# Altium PCB arm_board_n.PcbDoc (part 3 of 3)
Units mm, origin at the board's own origin, x right, y up, seen from the top; angles counter-clockwise.
Board outline 101.22 x 59.56 mm, 4 copper layers (Top Layer, Int1 (GND), Int2 (PWR), Bottom Layer), stack 1.565 mm thick; 88 components, 104 nets, 470 pads, 175 vias.
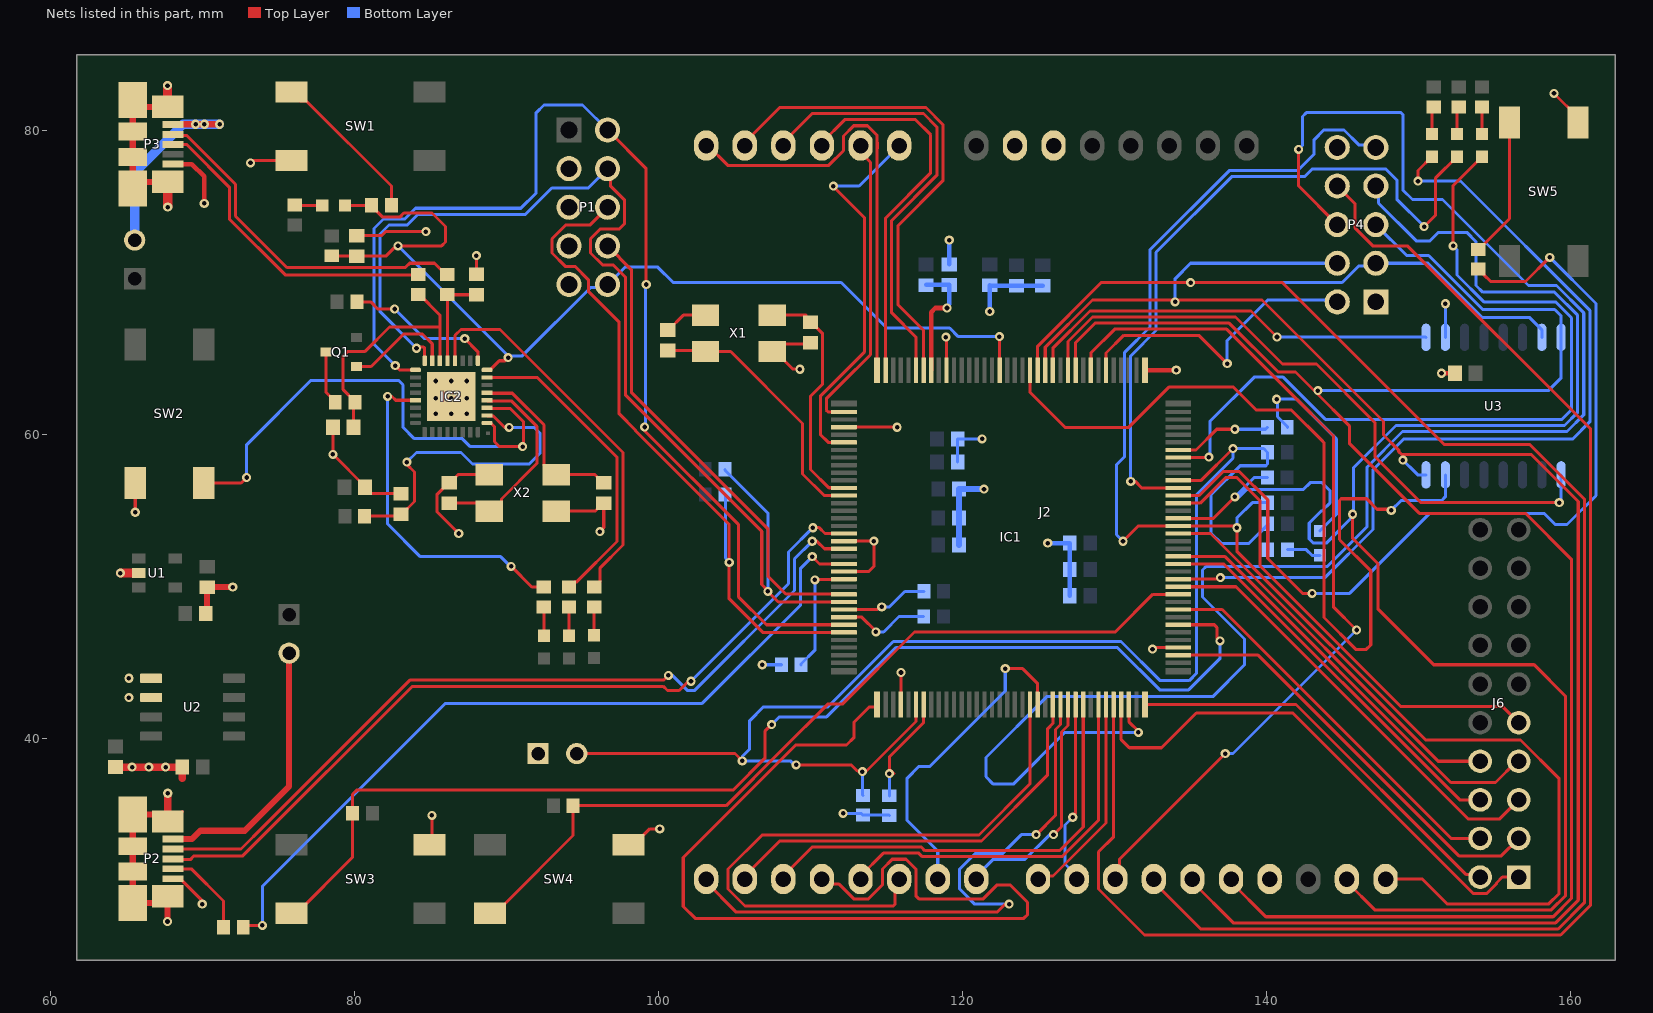
[diagram p4: the nets of this part, all layers, seen from the top]

## Via types
v1: diameter 0.6, hole 0.3, Top Layer to Bottom Layer, 175 vias

## Nets (pads, with @x,y where several pads share a name; then routed paths per layer and width w, separated by ;. In a path a pad name is that pad's centre, name@x,y a point inside that pad or via, vN(x,y) a via of type N, cw(c..) or ccw(c..) an arc to the next point about the centre after c; other vN are vias at no path point) (continued)
BOOT1_1: IC1.P42 IC1.P98 J4.2 R23.1 R24.1 R27.2 R29.2 | length 99.4
  Top Layer w0.2: J4.2@94.615,38.989 105.029,38.989 v1(105.508,38.51) v1@105.508,38.344 ; v1(109.044,38.245) 109.075,38.245 109.093,38.227 112.694,38.227 113.075,37.846 113.682,37.846 116.94,41.104 IC1.P42@116.94,42.213 ; IC1.P98@134.19,56.963 135.703,56.963 v1(137.795,59.055)
  Bottom Layer w0.2: v1(109.044,38.245) 108.936,38.245 108.671,38.51 v1(105.508,38.51) 105.508,38.799 105.996,39.287 105.996,41.155 106.9,42.059 111.147,42.059 115.443,46.355 130.429,46.355 133.004,43.78 134.909,43.78 135.392,44.264 135.392,56.017 137.795,58.42 v1(137.795,59.055) 139.812,59.055 R23.1@140.066,58.801 140.066,58.042 139.949,57.925 138.264,57.925 136.352,56.013 136.352,53.496 137.027,52.821 138.85,52.821 140.081,54.052 R24.1@140.081,54.102 R27.2@140.081,52.4 ; v1(113.411,37.8) 113.411,36.27 R29.2@113.448,36.232
BOOT1_2: IC1.P43 R30.2 | length 7
  Top Layer w0.2: v1@115.48,37.68 115.189,37.972 115.189,38.787 117.44,41.038 IC1.P43@117.44,42.213
  Bottom Layer w0.2: R30.2@115.189,36.21 v1(115.189,37.673)
BOOT2_9: IC1.P102 R28.2 | length 6.5
  Top Layer w0.2: IC1.P102@134.19,58.963 135.355,58.963 136.717,60.325 v1(137.922,60.325)
  Bottom Layer w0.2: v1(137.922,60.325) 139.939,60.325 R28.2@140.066,60.452
GND: C1.1 C2.1 C4.1 C5.1 C6.1 C7.1 C8.1 C9.1 C10.1 C11.2 C12.1 C13.1 C14.1 C15.1 C16.1 C17.1 C18.1 C19.1 C20.1 C21.1 C22.1 C23.1 C24.1 C25.1 C26.1 IC1.P4 IC1.P19 IC1.P23 IC1.P40 IC1.P76 IC1.P109 IC1.P135 IC2.EXP J2.6 J2.7 J2.29 J4.1 LED1.1 P1.3 P1.5 P1.7 P1.9 P2.5 P2.SH1 P2.SH2 P2.SH3 P2.SH4 P2.SH5 P2.SH6 P3.5 P4.1 P4.10 R1.2 R28.1 R29.1 R30.1 SW1.2 SW2.1 SW3.3 SW4.3 SW5.4 U1.2 U2.1 U2.2 U3.10 X1.4 X2.2 X2.4 | length 134
  Top Layer w0.2: v1(65.568,54.865) SW2.1@65.568,56.791 ; U2.2@66.192,42.672 U2.2@66.617,42.672 ; P2.SH2@67.255,29.143 67.691,29.579 P2.SH2@67.705,29.593 ; P2.SH1@67.255,34.968 P2.SH1@67.705,34.518 ; P2.SH1@68.017,34.518 P2.SH1@68.667,35.168 ; P2.5@68.065,30.756 68.53,30.756 69.977,29.309 v1(69.977,29.083) ; C15.1@70.214,48.199 C15.1@70.301,48.286 ; v1(73.152,77.851) 73.315,78.014 SW1.2@75.841,78.014 ; C21.1@78.573,60.452 v1(78.573,58.677) 80.685,56.565 C22.1@80.685,56.515 80.685,56.465 81.063,56.087 C19.1@83.058,56.087 ; C11.2@80.137,73.065 81.776,73.065 82.036,73.325 v1(84.693,73.325) ; SW3.3@84.941,32.984 85.09,33.133 v1(85.09,34.925) ; v1@86.868,53.467 v1(86.851,53.467) 85.433,54.885 85.433,56.059 86.183,56.809 C23.1@86.233,56.809 86.283,56.809 86.808,57.334 X2.2@88.859,57.334 ; C20.1@88.011,70.525 v1(88.011,71.755) ; X2.4@93.259,54.934 95.818,54.934 96.343,55.459 C24.1@96.393,55.459 96.393,53.848 v1(96.139,53.594) ; P1.9@93.946,69.85 P1.9@94.107,69.85 ; SW4.3@98.022,32.984 98.372,32.984 99.424,34.036 v1(100.076,34.036) ; v1(109.293,64.277) 108.842,64.277 107.684,65.435 X1.4@107.484,65.435 107.992,65.943 C7.1@110.278,65.943 ; IC1.P23@112.19,50.963 113.828,50.963 114.161,51.296 114.161,52.955 v1(114.169,52.963) IC1.P19@112.19,52.963 ; IC1.P4@112.19,60.463 115.686,60.463 v1(115.692,60.457) v1@115.697,60.452 ; IC1.P40@115.94,42.213 115.94,44.312 v1(115.951,44.323) ; v1@118.872,66.421 118.94,66.353 IC1.P135@118.94,64.213 ; v1(132.499,45.863) 132.585,45.863 132.685,45.963 IC1.P76@134.19,45.963 ; v1(158.915,82.423) 160.492,80.846 SW5.4@160.492,80.496
  Top Layer w0.3: P3.5@68.065,77.769 69.297,77.769 70.104,76.962 v1(70.104,75.184) ; IC1.P109@132,64.213 v1(134.063,64.213) ; v1(151.511,64.008) C25.1@152.4,64.008
  Top Layer w0.4: P2.SH2@67.255,29.143 P2.SH6@65.405,29.143 P2.SH5@65.405,31.218 P2.SH4@65.405,32.893 P2.SH3@65.405,34.968 P2.SH1@67.255,34.968 ; v1(67.691,27.94) P2.SH2@67.691,29.579 ; C15.1@70.301,48.286 C16.1@70.301,49.937 v1(71.983,49.937)
  Top Layer w0.5: C17.1@64.262,38.1 v1(65.363,38.1) v1(66.465,38.1) v1(67.566,38.1) C18.1@68.667,38.1 68.667,37.367 ; P2.SH1@67.705,34.518 v1(67.705,36.378)
  Top Layer w0.6: v1(64.586,50.866) U1.2@65.799,50.866
  Bottom Layer w0.2: v1(106.822,44.831) R1.2@108.077,44.831 R1.2@108.067,44.841 ; v1(112.141,35.052) 113.357,35.052 113.357,35.024 R29.1@113.448,34.932 ; R29.1@113.462,34.946 115.153,34.946 R30.1@115.189,34.91 ; C1.1@119.674,58.166 C2.1@119.674,59.69 v1(121.285,59.69) ; C14.1@121.793,69.81 C14.1@121.833,69.77 ; v1(140.661,62.302) 140.716,62.247 140.716,61.152 141.366,60.502 R28.1@141.366,60.452 ; v1@140.716,62.357 140.771,62.302 141.983,62.302 144.591,59.694 144.591,54.713 LED1.1@143.51,53.632 ; U3.10@151.765,66.374 v1(151.765,68.58)
  Bottom Layer w0.3: C26.1@119.126,71.171 v1(119.126,72.771) ; v1(121.793,68.072) C14.1@121.793,69.81 ; C14.1@121.833,69.77 C12.1@125.273,69.77 ; v1(125.603,52.832) C8.1@127.047,52.832 C9.1@127.047,51.105 C10.1@127.047,49.378
  Bottom Layer w0.4: C4.1@119.761,52.705 C5.1@119.761,54.483 C6.1@119.761,56.388 v1(121.412,56.388)
  other v1: 65.151,42.672 65.151,43.942 85.344,61.341 86.36,61.341 87.376,61.341 85.344,62.357 86.36,62.357 87.376,62.357 85.344,63.5 86.36,63.5 87.376,63.5 118.906,66.387
NetC3_1: C3.1 X1.2 | length 2.9
  Top Layer w0.2: C3.1@100.6,66.857 100.65,66.857 101.628,67.835 X1.2@103.084,67.835
NetC3_2: C3.2 IC1.P13 X1.3 | length 17.5
  Top Layer w0.2: C3.2@100.6,65.507 103.012,65.507 X1.3@103.084,65.435 104.745,65.435 109.474,60.706 109.474,57.38 110.891,55.963 IC1.P13@112.19,55.963
NetC7_2: C7.2 IC1.P12 X1.1 | length 15.8
  Top Layer w0.2: X1.1@107.484,67.835 109.686,67.835 109.686,67.715 C7.2@109.982,67.419 ; C7.2@109.998,67.365 110.048,67.365 110.798,66.615 110.798,63.3 110.001,62.503 110.001,57.677 111.199,56.478 112.175,56.478 IC1.P12@112.19,56.463
NetC11_1: C11.1 D1.2 IC1.P128 IC2.8 P1.10 R7.2 R8.2 | length 67.3
  Top Layer w0.2: R7.2@78.486,71.74 80.112,71.74 C11.1@80.137,71.715 82.05,71.715 82.567,72.231 82.589,72.231 82.748,72.39 85.725,72.39 85.979,72.644 85.979,73.66 85.09,74.549 83.239,74.549 82.972,74.282 81.848,74.282 81.123,75.007 R8.2@81.123,75.057 D1.2@79.375,75.057 ; IC2.8@88.71,64.234 88.92,64.234 89.52,64.834 89.899,64.834 v1(90.103,65.038) ; v1(122.428,66.421) 122.44,66.409 IC1.P128@122.44,64.213
  Bottom Layer w0.2: v1(82.856,72.39) 90.103,65.143 v1(90.103,65.038) 90.224,65.159 91.038,65.159 95.522,69.642 96.439,69.642 P1.10@96.647,69.85 97.79,70.993 99.949,70.993 100.965,69.977 112.014,69.977 115.004,66.987 119.155,66.987 119.721,66.421 v1(122.428,66.421)
NetC19_2: C19.2 IC2.2 R9.1 | length 21.4
  Top Layer w0.2: R9.1@80.66,54.61 82.931,54.61 C19.2@83.058,54.737 83.108,54.737 83.947,55.576 83.947,57.517 83.439,58.025 v1(83.439,58.166) ; IC2.2@88.71,61.234 88.75,61.194 89.123,61.194 89.865,60.452 v1(90.17,60.452)
  Bottom Layer w0.2: v1(83.439,58.166) 84.074,58.801 86.995,58.801 87.757,58.039 91.495,58.039 92.202,58.746 92.202,60.071 91.821,60.452 v1(90.17,60.452)
NetC20_2: C20.2 IC2.13 R13.2 | length 6.3
  Top Layer w0.2: IC2.13@86.11,64.834 R13.2@86.11,69.196 ; R13.2@86.121,69.215 R13.2@86.106,69.2 R13.2@86.11,69.196 ; C20.2@88.011,69.175 86.131,69.175 R13.2@86.11,69.196
NetC21_2: C21.2 IC2.14 R14.2 R15.2 | length 17.2
  Top Layer w0.2: C21.2@79.923,60.452 79.923,62.001 R15.2@80.025,62.103 80.025,62.153 79.248,62.93 79.248,65.151 79.55,65.453 80.693,65.453 82.296,67.056 85.61,67.056 ; R14.2@84.201,69.2 84.251,69.2 85.61,67.841 85.61,67.056 ; IC2.14@85.61,64.834 85.61,67.056
NetC23_2: C23.2 IC2.4 X2.3 | length 13.8
  Top Layer w0.2: C23.2@86.233,55.459 88.334,55.459 X2.3@88.859,54.934 89.059,54.934 89.659,55.534 89.659,55.734 91.994,58.069 91.994,60.516 90.316,62.194 88.75,62.194 IC2.4@88.71,62.234
NetC24_2: C24.2 IC2.5 X2.1 | length 11.7
  Top Layer w0.2: IC2.5@88.71,62.734 88.75,62.694 90.382,62.694 92.459,60.617 92.459,57.934 93.059,57.334 X2.1@93.259,57.334 95.818,57.334 96.343,56.809 C24.2@96.393,56.809
NetC26_2: C26.2 FB1.2 IC1.P137 | length 8.1
  Top Layer w0.3: IC1.P137@117.94,64.213 117.94,68.029 118.215,68.304 v1(118.977,68.304)
  Bottom Layer w0.2: FB1.2@117.602,69.81 FB1.2@117.613,69.821 ; v1(118.977,68.304) 118.977,68.413 v1@119.126,68.561
  Bottom Layer w0.3: FB1.2@117.613,69.821 C26.2@119.126,69.821 v1@119.126,68.561
NetD1_1: D1.1 R6.1 | length 1.8
  Top Layer w0.2: R6.1@76.073,75.072 76.088,75.057 D1.1@77.875,75.057
NetD2_2: D2.2 R10.2 | length 1.9
  Top Layer w0.2: D2.2@94.107,46.736 R10.2@94.107,48.638
NetD3_2: D3.2 R11.2 | length 1.9
  Top Layer w0.2: D3.2@95.758,46.769 R11.2@95.758,48.641
NetD4_2: D4.2 R12.2 | length 1.9
  Top Layer w0.2: D4.2@92.456,46.739 R12.2@92.456,48.641
NetD5_1: D5.1 R19.2 | length 1.8
  Top Layer w0.2: D5.1@150.876,79.759 150.876,81.407 R19.2@151.003,81.534
NetD5_2: D5.2 IC1.P85 | length 57.8
  Top Layer w0.2: IC1.P85@134.19,50.463 136.76,50.463 136.86,50.563 v1(136.968,50.563) ; v1(149.964,76.656) 149.964,77.347 D5.2@150.876,78.259
  Bottom Layer w0.2: v1(136.968,50.563) 143.831,50.563 147.004,53.736 147.004,57.665 149.029,59.69 160.147,59.69 161.271,60.814 161.271,68.152 152.767,76.656 v1(149.964,76.656)
NetD6_1: D6.1 R20.2 | length 1.8
  Top Layer w0.2: D6.1@152.527,79.759 152.527,81.407 R20.2@152.654,81.534
NetD6_2: D6.2 IC1.P97 | length 46.8
  Top Layer w0.2: v1(131.064,56.896) 131.354,56.896 131.787,56.463 IC1.P97@134.19,56.463 ; v1(150.368,73.66) 151.104,74.396 151.104,76.836 D6.2@152.527,78.259
  Bottom Layer w0.2: v1(131.064,56.896) 131.064,65.151 132.734,66.821 132.734,71.97 137.707,76.943 142.493,76.943 143.002,77.452 147.846,77.452 148.571,76.727 148.571,75.457 v1(150.368,73.66)
NetD7_1: D7.1 R21.2 | length 1.8
  Top Layer w0.2: D7.1@154.178,79.759 R21.2@154.178,81.534
NetD7_2: D7.2 IC1.P101 | length 54.3
  Top Layer w0.2: IC1.P101@134.19,58.463 134.203,58.476 136.19,58.476 v1(136.203,58.488) ; v1(152.273,72.39) 152.273,76.354 D7.2@154.178,78.259
  Bottom Layer w0.2: v1(136.203,58.488) 136.271,58.557 136.271,60.833 139.192,63.754 141.097,63.754 143.872,60.979 159.444,60.979 160.071,61.606 160.071,67.655 159.019,68.707 154.3,68.707 152.527,70.48 152.527,72.136 v1(152.273,72.39)
NetIC1_P2: IC1.P2 J2.10 | length 20.1
  Top Layer w0.2: IC1.P2@112.19,61.463 111.157,61.463 111.04,61.58 111.04,62.336 112.053,63.349 113.938,65.234 113.938,77.888 113.288,78.538 J2.10@113.288,78.994
NetIC1_P6: IC1.P6 J2.9 | length 25.6
  Top Layer w0.2: v1(111.506,76.327) 111.506,76.286 113.538,74.254 113.538,65.399 110.64,62.501 110.64,59.979 111.156,59.463 IC1.P6@112.19,59.463
  Bottom Layer w0.2: v1(111.506,76.327) 113.195,76.327 115.828,78.96 J2.9@115.828,78.994
NetIC1_P18: IC1.P18 P2.3 | length 54.8
  Top Layer w0.2: P2.3@68.065,32.056 68.117,32.004 69.186,32.004 69.44,32.258 72.647,32.258 83.804,43.415 100.3,43.415 100.584,43.131 101.354,43.131 101.972,43.749 v1(102.134,43.749) ; v1(110.149,53.848) 110.568,53.848 110.953,53.463 IC1.P18@112.19,53.463
  Bottom Layer w0.2: v1(102.134,43.749) 108.547,50.162 108.547,52.246 v1(110.149,53.848)
NetIC1_P20: IC1.P20 P2.2 | length 54.8
  Top Layer w0.2: P2.2@68.065,32.706 72.529,32.706 74.091,34.268 83.638,43.815 100.33,43.815 v1(100.647,44.133) ; v1(110.109,52.959) 110.415,52.959 110.911,52.463 IC1.P20@112.19,52.463
  Bottom Layer w0.2: v1(100.647,44.133) 100.901,44.133 101.885,43.149 102.382,43.149 108.947,49.713 108.947,51.797 v1(110.109,52.959)
NetIC1_P22: IC1.P22 R31.2 | length 52.7
  Top Layer w0.2: R31.2@72.674,27.559 72.801,27.686 v1(73.929,27.686) ; v1(110.109,51.943) 110.589,51.463 IC1.P22@112.19,51.463
  Bottom Layer w0.2: v1(73.929,27.686) 73.929,30.241 85.979,42.291 102.87,42.291 109.347,48.768 109.347,51.181 v1(110.109,51.943)
NetIC1_P24: IC1.P24 R1.1 | length 7.9
  Top Layer w0.2: v1(110.282,50.419) 110.304,50.441 112.168,50.441 IC1.P24@112.19,50.463
  Bottom Layer w0.2: R1.1@109.377,44.831 109.377,44.881 110.282,45.786 v1(110.282,50.419)
NetIC1_P26: IC1.P26 P1.8 | length 31.6
  Top Layer w0.2: P1.8@96.647,72.39 98.209,70.828 98.209,62.758 107.188,53.779 107.188,50.673 108.377,49.484 112.169,49.484 IC1.P26@112.19,49.463
NetIC1_P27: IC1.P27 IC2.16 P1.4 R2.1 | length 76.4
  Top Layer w0.2: v1(84.074,65.659) 84.147,65.732 84.54,65.732 84.61,65.662 IC2.16@84.61,64.834 ; P1.4@96.647,77.47 96.823,77.294 96.823,76.345 97.772,75.396 97.772,73.863 97.424,73.515 96.181,73.515 95.522,72.856 95.522,71.924 96.306,71.14 97.008,71.14 97.809,70.339 97.809,62.592 106.788,53.613 106.788,50.106 107.188,49.706 v1(107.188,49.657) 107.882,48.963 IC1.P27@112.19,48.963
  Bottom Layer w0.2: v1(84.074,65.659) 81.68,68.053 81.68,73.171 82.267,73.758 83.468,73.758 84.176,74.466 84.963,74.466 84.987,74.442 91.216,74.442 92.974,76.2 95.377,76.2 P1.4@96.647,77.47 ; R2.1@104.372,57.683 104.372,57.633 107.188,54.817 v1(107.188,49.657)
NetIC1_P28: IC1.P28 R4.1 | length 5.8
  Top Layer w0.2: IC1.P28@112.19,48.463 114.395,48.463 114.573,48.641 v1(114.681,48.641)
  Bottom Layer w0.2: v1(114.681,48.641) 115.189,48.641 116.205,49.657 R4.1@117.46,49.657
NetIC1_P29: IC1.P29 R5.1 | length 6.1
  Top Layer w0.2: IC1.P29@112.19,47.963 113.368,47.963 114.3,47.031 v1(114.3,46.99)
  Bottom Layer w0.2: v1(114.3,46.99) 114.808,46.99 115.824,48.006 R5.1@117.445,48.006
NetIC1_P30: IC1.P30 IC2.17 P1.2 | length 75.6
  Top Layer w0.2: v1(82.677,64.516) 82.959,64.234 IC2.17@84.01,64.234 ; P1.2@96.647,80.01 99.187,77.47 v1(99.187,69.85) ; v1(99.08,60.472) 99.08,60.235 105.248,54.068 105.248,49.311 107.096,47.463 IC1.P30@112.19,47.463
  Bottom Layer w0.2: v1(82.677,64.516) 81.28,65.913 81.28,73.533 81.905,74.158 83.302,74.158 84.01,74.866 90.938,74.866 91.948,75.877 91.948,81.153 92.456,81.661 94.996,81.661 P1.2@96.647,80.01 ; v1(99.08,60.472) 99.134,60.526 99.134,69.797 v1(99.187,69.85)
NetIC1_P31: IC1.P31 P1.6 R3.1 | length 46.5
  Top Layer w0.2: P1.6@96.647,74.93 95.471,73.754 93.88,73.754 92.982,72.856 92.982,71.924 93.859,71.047 94.5,71.047 95.377,70.171 95.377,69.402 96.453,68.326 97.409,67.37 97.409,61.341 98.48,60.27 98.48,60.224 104.648,54.056 v1(104.648,51.562) 104.648,49.169 106.854,46.963 IC1.P31@112.19,46.963
  Bottom Layer w0.2: R3.1@104.372,56.032 104.394,56.01 104.394,51.879 104.648,51.625 v1(104.648,51.562)
NetIC1_P37: IC1.P37 J2.18 | length 63.4
  Top Layer w0.2: J2.18@110.748,30.734 111.064,30.418 111.848,30.418 112.832,29.434 113.809,29.434 114.728,30.353 114.728,31.39 115.372,32.034 116.284,32.034 116.928,31.39 116.928,29.63 117.124,29.434 121.364,29.434 122.283,30.353 123.115,30.353 124.269,29.2 124.269,28.384 124.033,28.148 102.408,28.148 101.624,28.932 101.624,32.155 109.017,39.548 112.365,39.548 112.869,40.052 112.869,41.065 113.841,42.037 114.28,42.037 114.38,42.137 IC1.P37@114.38,42.213
NetIC1_P57: IC1.P57 J2.20 | length 42
  Top Layer w0.2: J2.20@115.828,30.734 115.56,30.466 115.56,29.073 115.443,28.956 105.69,28.956 104.568,30.078 104.568,31.39 106.812,33.634 121.079,33.634 124.44,36.995 IC1.P57@124.44,42.213
NetIC1_P58: IC1.P58 J2.21 | length 21.7
  Top Layer w0.2: v1(122.809,44.577) 123.952,44.577 124.94,43.589 IC1.P58@124.94,42.213
  Bottom Layer w0.2: J2.21@118.368,30.734 118.368,32.577 116.332,34.613 116.332,37.338 117.14,38.146 117.856,38.146 122.809,43.099 v1(122.809,44.577)
NetIC1_P60: IC1.P60 J2.16 | length 27.7
  Top Layer w0.2: J2.16@105.668,30.734 105.668,30.934 107.968,33.234 121.245,33.234 125.603,37.592 125.603,40.628 125.94,40.965 IC1.P60@125.94,42.213
NetIC1_P61: IC1.P61 J2.15 | length 41.3
  Top Layer w0.2: J2.15@103.128,30.734 103.128,30.534 105.106,28.556 122.268,28.556 122.795,29.083 123.06,29.083 v1(123.063,29.086) ; v1(124.841,33.655) 126.111,34.925 126.111,40.571 126.44,40.9 IC1.P61@126.44,42.213
  Bottom Layer w0.2: v1(123.063,29.086) 123.06,29.083 120.803,29.083 119.808,30.078 119.808,31.39 120.822,32.404 122.615,32.404 123.866,33.655 v1(124.841,33.655)
NetIC1_P62: IC1.P62 J2.22 | length 15.4
  Top Layer w0.2: v1(125.984,33.655) 126.511,34.182 126.511,40.405 126.94,40.834 IC1.P62@126.94,42.213
  Bottom Layer w0.2: J2.22@120.908,30.734 120.908,30.934 121.978,32.004 124.079,32.004 125.73,33.655 v1(125.984,33.655)
NetIC1_P63: IC1.P63 J2.24 | length 12.1
  Top Layer w0.2: v1(127.254,34.798) 127.254,34.906 127.44,35.092 IC1.P63@127.44,42.213
  Bottom Layer w0.2: v1(127.254,34.798) 126.746,34.29 126.746,31.728 127.508,30.966 J2.24@127.508,30.734
NetIC1_P64: IC1.P64 J2.17 | length 29.5
  Top Layer w0.2: J2.17@108.208,30.734 108.208,30.934 110.108,32.834 117.29,32.834 117.52,32.603 126.382,32.603 127.94,34.162 IC1.P64@127.94,42.213
NetIC1_P66: IC1.P66 J2.19 | length 25.2
  Top Layer w0.2: J2.19@113.288,30.734 113.288,30.934 114.788,32.434 117.124,32.434 117.355,32.203 126.547,32.203 128.94,34.596 IC1.P66@128.94,42.213
NetIC1_P67: IC1.P67 J2.23 | length 13.8
  Top Layer w0.2: J2.23@124.968,30.734 125.166,30.932 125.951,30.932 127.53,32.512 129.44,34.422 IC1.P67@129.44,42.213
NetIC1_P68: IC1.P68 P4.8 | length 102.5
  Top Layer w0.2: IC1.P68@129.94,42.213 129.94,33.515 128.948,32.523 128.948,30.078 131.975,27.051 159.353,27.051 161.309,29.007 161.309,60.358 149.295,72.372 147.017,72.372 145.829,73.56 145.829,75.151 P4.8@144.653,76.327
NetIC1_P69: IC1.P69 J6.1 | length 35
  Top Layer w0.2: IC1.P69@130.44,42.213 130.44,39.903 130.973,39.37 133.096,39.37 135.382,41.656 141.732,41.656 153.602,29.786 154.496,29.786 155.126,30.416 155.126,30.471 155.516,30.861 J6.1@156.591,30.861
NetIC1_P70: IC1.P70 P4.6 | length 115.5
  Top Layer w0.2: IC1.P70@130.94,42.213 130.94,41.087 131.572,40.455 v1(131.572,40.386) ; v1(142.113,78.74) 142.113,76.327 P4.6@144.653,73.787
  Bottom Layer w0.2: v1(131.572,40.386) 126.746,40.386 123.337,36.977 122.027,36.977 121.539,37.465 121.539,38.735 125.54,42.736 136.462,42.736 138.557,44.831 138.557,46.526 135.792,49.29 135.792,51.062 136.039,51.308 144.01,51.308 146.604,53.902 146.604,57.831 148.952,60.179 159.776,60.179 160.871,61.274 160.871,67.987 159.078,69.78 157.238,69.78 151.58,75.438 149.606,75.438 148.971,76.073 148.971,81.036 148.854,81.153 142.621,81.153 142.367,80.899 142.367,78.994 v1(142.113,78.74)
NetIC1_P72: IC1.P72 J6.2 | length 26.8
  Top Layer w0.2: IC1.P72@132,42.213 141.937,42.213 153.11,31.04 153.872,31.04 J6.2@154.051,30.861
NetIC1_P75: IC1.P75 J6.3 | length 28.3
  Top Layer w0.2: IC1.P75@134.19,45.463 139.449,45.463 152.654,32.258 155.448,32.258 J6.3@156.591,33.401
NetIC1_P79: IC1.P79 R17.1 SW3.2 | length 78.6
  Top Layer w0.2: SW3.2@75.841,28.484 76.191,28.484 79.868,32.161 R17.1@79.868,35.052 79.868,36.307 80.137,36.576 104.897,36.576 106.995,38.674 106.995,40.447 v1(107.442,40.894) ; IC1.P79@134.19,47.463 136.56,47.463 136.733,47.29 136.733,46.603 v1(136.938,46.398)
  Bottom Layer w0.2: v1(107.442,40.894) 107.95,41.402 111.056,41.402 115.609,45.955 130.194,45.955 132.969,43.18 134.874,43.18 136.948,45.254 136.948,46.388 v1(136.938,46.398)
NetIC1_P81: IC1.P81 J6.4 | length 26.1
  Top Layer w0.2: IC1.P81@134.19,48.463 137.084,48.463 152.146,33.401 J6.4@154.051,33.401
NetIC1_P83: IC1.P83 R18.1 SW4.2 | length 55.1
  Top Layer w0.2: SW4.2@88.922,28.484 89.272,28.484 89.872,29.084 89.872,29.088 94.376,33.592 R18.1@94.376,35.56 104.446,35.56 108.077,39.191 111.125,42.238 112.088,42.238 116.841,46.991 130.049,46.991 132.521,49.463 IC1.P83@134.19,49.463
NetIC1_P84: IC1.P84 J6.5 | length 29.3
  Top Layer w0.2: IC1.P84@134.19,49.963 137.997,49.963 153.289,34.671 155.321,34.671 J6.5@156.591,35.941
NetIC1_P87: IC1.P87 J6.6 | length 26.3
  Top Layer w0.2: IC1.P87@134.19,51.463 137.184,51.463 152.706,35.941 J6.6@154.051,35.941
NetIC1_P88: IC1.P88 J6.7 | length 29.1
  Top Layer w0.2: IC1.P88@134.19,51.963 137.25,51.963 152.129,37.084 155.067,37.084 156.464,38.481 J6.7@156.591,38.481
NetIC1_P91: IC1.P91 J6.8 | length 26.1
  Top Layer w0.2: IC1.P91@134.19,53.463 136.316,53.463 151.298,38.481 J6.8@154.051,38.481
NetIC1_P92: IC1.P92 J2.32 P4.9 R26.1 | length 99.3
  Top Layer w0.2: v1(130.556,52.959) 131.56,53.963 137.826,53.963 137.941,53.848 v1(138.049,53.848) 138.049,52.295 150.466,39.878 156.714,39.878 159.258,37.334 159.258,29.785 158.575,29.102 151.879,29.102 150.247,30.734 J2.32@147.828,30.734
  Bottom Layer w0.2: v1(130.556,52.959) 130.129,53.386 130.129,57.993 130.664,58.528 130.664,65.386 132.334,67.056 132.334,72.136 137.541,77.343 142.038,77.343 143.132,78.437 143.132,79.378 143.764,80.01 145.101,80.01 146.068,79.043 147.017,79.043 P4.9@147.193,78.867 ; v1(138.049,53.848) 138.049,54.483 139.065,55.499 R26.1@140.066,55.499
NetIC1_P93: IC1.P93 J2.31 P4.7 R25.1 | length 117.2
  Top Layer w0.2: IC1.P93@134.19,54.463 136.505,54.463 v1(137.922,55.88) ; J2.31@145.288,30.734 145.288,30.534 147.12,28.702 158.741,28.702 159.658,29.619 159.658,42.78 157.607,44.831 151.003,44.831 147.32,48.514 147.32,51.493 145.669,53.144 v1(145.669,54.737)
  Bottom Layer w0.2: R25.1@140.051,57.15 139.192,57.15 v1(137.922,55.88) 138.212,55.88 138.707,56.375 142.429,56.375 142.869,56.815 143.643,56.815 144.191,56.267 144.191,55.493 143.643,54.945 143.599,54.945 142.81,54.156 142.81,53.108 143.086,52.832 143.934,52.832 145.715,54.613 145.715,57.772 148.522,60.579 159.61,60.579 160.471,61.44 160.471,67.821 158.95,69.342 154.231,69.342 153.783,69.79 153.783,72.669 153.174,73.279 151.309,73.279 150.755,72.725 149.846,72.725 147.369,75.202 147.369,76.151 P4.7@147.193,76.327
NetIC1_P95: IC1.P95 J6.9 | length 32.3
  Top Layer w0.2: IC1.P95@134.19,55.463 135.631,55.463 137.318,57.15 138.049,57.15 139.573,55.626 139.573,51.337 148.814,42.096 155.516,42.096 J6.9@156.591,41.021
NetIC1_P96: IC1.P96 R22.1 | length 59.7
  Top Layer w0.2: IC1.P96@134.19,55.963 135.565,55.963 137.152,57.55 138.215,57.55 140.081,55.684 140.081,51.816 142.367,49.53 v1(143.002,49.53) ; R22.1@153.924,70.866 153.974,70.866 154.299,70.541 154.299,70.491 154.744,70.046 157.041,70.046 v1(158.633,71.638)
  Bottom Layer w0.2: v1(143.002,49.53) 145.467,49.53 150.733,54.796 158.258,54.796 158.998,54.056 159.772,54.056 161.671,55.955 161.671,68.601 v1(158.633,71.638)
NetIC1_P114: IC1.P114 P4.2 | length 20.3
  Top Layer w0.2: IC1.P114@129.44,64.213 129.44,65.336 130.611,66.507 135.55,66.507 v1(137.414,64.643)
  Bottom Layer w0.2: v1(137.414,64.643) 137.414,66.167 140.081,68.834 144.526,68.834 P4.2@144.653,68.707
NetIC1_P116: IC1.P116 J2.25 | length 57.3
  Top Layer w0.2: IC1.P116@128.44,64.213 128.44,65.336 130.011,66.907 137.378,66.907 141.596,62.689 144.336,59.95 144.338,59.947 144.397,59.889 144.397,48.643 v1(145.923,47.117) ; J2.25@130.048,30.734 130.316,31.002 130.316,32.018 v1(137.287,38.989)
  Bottom Layer w0.2: v1(137.287,38.989) 137.795,38.989 v1(145.923,47.117)
NetIC1_P118: IC1.P118 J2.28 P4.5 U3.16 | length 123.5
  Top Layer w0.2: IC1.P118@127.44,64.213 127.44,66.03 128.717,67.307 137.544,67.307 140.765,64.086 141.908,64.086 143.256,62.738 145.446,60.548 145.446,59.405 150.055,54.796 157.036,54.796 160.058,51.774 160.058,29.453 158.856,28.251 139.951,28.251 137.668,30.534 J2.28@137.668,30.734
  Bottom Layer w0.2: v1(143.383,62.865) 158.541,62.865 159.385,63.709 U3.16@159.385,66.374 159.385,67.776 158.962,68.199 154.221,68.199 150.665,71.755 149.225,71.755 P4.5@147.193,73.787
NetIC1_P119: IC1.P119 U3.1 | length 43.1
  Top Layer w0.2: IC1.P119@126.94,64.213 126.94,66.095 128.552,67.707 137.957,67.707 141.049,64.615 143.284,64.615 147.126,60.773 147.126,58.538 150.165,55.499 v1(159.258,55.499)
  Bottom Layer w0.2: v1(159.258,55.499) 159.258,55.607 159.385,55.734 U3.1@159.385,57.324
NetIC1_P121: IC1.P121 U3.9 | length 27.7
  Top Layer w0.2: IC1.P121@125.94,64.213 125.94,65.661 128.386,68.107 138.978,68.107 v1(140.69,66.395)
  Bottom Layer w0.2: v1(140.69,66.395) 150.474,66.395 U3.9@150.495,66.374
NetIC1_P122: IC1.P122 J2.27 P4.4 U3.8 | length 112.7
  Top Layer w0.2: IC1.P122@125.44,64.213 125.44,65.727 128.547,68.834 133.523,68.834 ; v1(133.985,68.707) 133.858,68.834 133.523,68.834 ; J2.27@135.128,30.734 135.128,30.534 137.811,27.851 159.021,27.851 160.509,29.339 160.509,55.57 157.405,58.674 148.88,58.674 148.7,58.853 148.7,58.945 147.701,59.944 147.701,60.833 139.7,68.834 133.523,68.834
  Bottom Layer w0.2: v1(133.985,68.707) 133.985,70.231 135.001,71.247 P4.4@144.653,71.247 ; v1@148.844,58.42 149.94,57.324 U3.8@150.495,57.324
  other v1: 148.971,58.293
NetIC1_P123: IC1.P123 J2.26 P4.3 U3.15 | length 128.2
  Top Layer w0.2: IC1.P123@124.94,64.213 124.94,65.792 129.125,69.977 v1(135.001,69.977) 141.036,69.977 151.704,59.309 157.336,59.309 160.909,55.736 160.909,29.173 159.187,27.451 135.671,27.451 132.588,30.534 J2.26@132.588,30.734
  Bottom Layer w0.2: v1(135.001,69.977) 144.974,69.977 146.068,71.071 147.017,71.071 P4.3@147.193,71.247 150.607,71.247 154.163,67.691 157.29,67.691 158.115,66.866 U3.15@158.115,66.374
NetIC1_P124: IC1.P124 U3.7 | length 59.4
  Top Layer w0.2: IC1.P124@124.44,64.213 124.44,62.758 126.746,60.452 130.937,60.452 133.604,63.119 137.795,63.119 139.319,61.595 141.634,61.595 143.666,59.563 143.784,59.446 143.784,47.934 145.871,45.847 146.568,45.847 146.858,46.137 146.858,51.008 144.855,53.011 144.797,53.069 144.797,55.636 144.914,55.753 146.584,55.753 147.274,55.063 148.137,55.063 v1(148.209,54.991)
  Bottom Layer w0.2: v1(148.209,54.991) 148.844,55.626 151.511,55.626 151.765,55.88 U3.7@151.765,57.324
NetIC1_P138: IC1.P138 J2.13 | length 32.8
  Top Layer w0.2: J2.13@105.668,78.994 105.668,79.194 107.968,81.494 117.593,81.494 118.706,80.381 118.706,76.669 115.74,73.703 115.74,68.53 117.44,66.83 IC1.P138@117.44,64.213
NetIC1_P139: IC1.P139 J2.12 | length 29.3
  Top Layer w0.2: J2.12@108.208,78.994 108.208,79.194 110.108,81.094 117.427,81.094 118.306,80.216 118.306,77.031 115.34,74.065 115.34,67.986 116.94,66.386 IC1.P139@116.94,64.213
NetIC1_P143: IC1.P143 J2.11 | length 25.1
  Top Layer w0.2: J2.11@110.748,78.994 110.748,79.194 112.248,80.694 116.91,80.694 117.906,79.698 117.906,77.196 114.94,74.231 IC1.P143@114.94,64.213
NetIC1_P144: IC1.P144 J2.14 | length 29.1
  Top Layer w0.2: J2.14@103.128,78.994 103.251,78.994 104.551,77.694 111.204,77.694 112.162,78.652 112.162,79.623 112.832,80.294 113.744,80.294 114.321,79.716 114.38,79.658 114.38,79.326 cw(c113.288,79.194) 114.388,79.194 114.388,78.794 cw(c113.288,78.794) 114.38,78.662 IC1.P144@114.38,64.213
NetIC2_1: IC2.1 IC2.3 SW2.3 | length 36.5
  Top Layer w0.2: SW2.3@70.068,56.791 72.539,56.791 v1(72.898,57.15) ; IC2.1@88.71,60.734 88.75,60.694 89.003,60.694 89.2,60.497 89.2,59.507 89.504,59.203 91.038,59.203 v1(91.059,59.182) 91.105,59.228 91.105,60.839 90.25,61.694 88.75,61.694 IC2.3@88.71,61.734
  Bottom Layer w0.2: v1(72.898,57.15) 72.898,59.309 77.133,63.544 82.887,63.544 83.185,63.246 83.185,60.452 83.928,59.709 87.085,59.709 87.612,59.182 v1(91.059,59.182)
NetIC2_7: IC2.7 R10.1 | length 20.7
  Top Layer w0.2: IC2.7@88.71,63.734 92.02,63.734 97.263,58.491 97.263,52.94 94.586,50.263 94.432,50.263 R10.1@94.107,49.938
NetIC2_9: IC2.9 R16.2 | length 9.9
  Top Layer w0.2: R16.2@80.152,68.707 81.053,68.707 81.521,68.24 v1(82.636,68.24) ; v1(87.249,66.294) 88.11,65.433 IC2.9@88.11,64.834
  Bottom Layer w0.2: v1(82.636,68.24) 84.582,66.294 v1(87.249,66.294)
NetIC2_12: IC2.12 R11.1 | length 25.9
  Top Layer w0.2: IC2.12@86.61,64.834 86.61,66.503 87,66.894 89.57,66.894 97.663,58.801 97.663,52.705 96.133,51.175 96.133,50.266 95.808,49.941 R11.1@95.758,49.941
NetIC2_15: IC2.15 Q1.1 | length 7.3
  Top Layer w0.2: Q1.1@80.121,64.455 81.092,64.455 83.231,66.594 84.461,66.594 85.11,65.945 IC2.15@85.11,64.834
NetIC2_21: IC2.21 R12.1 | length 22.3
  Top Layer w0.2: v1(82.169,62.484) 82.459,62.484 82.708,62.234 IC2.21@84.01,62.234 ; v1(90.297,51.308) 91.664,49.941 R12.1@92.456,49.941
  Bottom Layer w0.2: v1(82.169,62.484) 82.169,54.102 84.328,51.943 89.61,51.943 90.245,51.308 v1(90.297,51.308)
NetJ1_2: J1.2 P2.1 | length 17.8
  Top Layer w0.4: P2.1@68.065,33.356 69.297,33.356 69.85,33.909 72.771,33.909 75.692,36.83 J1.2@75.692,45.593
NetJ3_2: J3.2 P3.1 | length 15.7
  Top Layer w0.2: v1@69.792,80.322 69.826,80.322 v1@69.892,80.306 ; v1(70.121,80.391) v1(71.12,80.391)
  Top Layer w0.4: J3.2@65.376,72.927 J3.2@65.532,72.771 ; P3.1@68.065,80.369 68.087,80.391 v1(71.12,80.391)
  Bottom Layer w0.6: J3.2@65.532,72.771 65.532,77.216 68.707,80.391 v1(70.121,80.391) v1(71.12,80.391)
  other v1: 69.54,80.391
NetLED1_2: LED1.2 R27.1 | length 2.3
  Bottom Layer w0.2: R27.1@141.381,52.4 142.623,52.4 142.991,52.032 LED1.2@143.51,52.032
NetP2_4: P2.4 R31.1 | length 6.1
  Top Layer w0.2: P2.4@68.19,31.281 P2.4@68.065,31.405 69.256,31.405 71.374,29.287 R31.1@71.374,27.559
NetP3_2: P3.2 R13.1 | length 23.2
  Top Layer w0.2: P3.2@68.065,79.72 68.124,79.661 68.938,79.661 72.159,76.44 72.159,74.347 75.541,70.965 83.342,70.965 83.624,71.247 85.26,71.247 85.682,70.825 85.731,70.825 85.852,70.704 R13.1@85.852,70.5
NetP3_3: P3.3 R14.1 | length 20.9
  Top Layer w0.2: P3.3@68.065,79.069 68.938,79.069 71.759,76.249 71.759,74.164 75.438,70.485 84.186,70.485 R14.1@84.201,70.5
NetP3_SH1: P3.SH1 P3.SH2 P3.SH3 P3.SH4 P3.SH5 P3.SH6 | length 14.1
  Top Layer w0.2: P3.SH6@65.405,75.919 P3.SH6@65.405,76.157 P3.SH6@65.855,76.607 ; P3.SH3@65.405,81.982 P3.SH3@65.855,81.532 ; P3.SH1@67.691,81.546 P3.SH1@67.705,81.532 ; v1(67.705,74.944) v1@67.705,74.971
  Top Layer w0.4: P3.SH6@65.405,76.157 P3.SH5@65.405,78.232 P3.SH4@65.405,79.907 P3.SH3@65.405,81.982 ; P3.SH6@65.855,76.607 P3.SH2@67.705,76.607 ; P3.SH3@65.855,81.532 P3.SH1@67.705,81.532
  Top Layer w0.6: P3.SH1@67.691,81.546 v1(67.691,82.931) ; v1@67.705,74.971 P3.SH2@67.705,76.607
NetQ1_3: Q1.3 R15.1 | length 3.6
  Top Layer w0.2: Q1.3@78.121,65.405 78.121,62.757 78.725,62.153 R15.1@78.725,62.103
NetR8_1: R8.1 SW1.4 | length 10.4
  Top Layer w0.2: SW1.4@75.841,82.514 76.441,81.914 76.836,81.914 82.423,76.327 R8.1@82.423,75.057
NetR22_2: R22.2 SW5.2 | length 9.2
  Top Layer w0.2: R22.2@153.924,72.166 153.974,72.166 155.992,74.184 SW5.2@155.992,80.496
pads on no net: IC1.P1 IC1.P3 IC1.P7 IC1.P8 IC1.P9 IC1.P10 IC1.P11 IC1.P14 IC1.P15 IC1.P21 IC1.P32 IC1.P33 IC1.P34 IC1.P35 IC1.P39 IC1.P45 IC1.P46 IC1.P54 IC1.P65 IC1.P73 IC1.P74 IC1.P78 IC1.P80 IC1.P82 IC1.P86 IC1.P89 IC1.P90 IC1.P99 IC1.P100 IC1.P103 IC1.P104 IC1.P105 IC1.P106 IC1.P108 IC1.P110 IC1.P112 IC1.P113 IC1.P115 IC1.P117 IC1.P120 IC1.P125 IC1.P126 IC1.P127 IC1.P129 IC1.P130 IC1.P132 IC1.P133 IC1.P134 IC1.P136 IC1.P140 IC1.P142 IC2.10 IC2.11 IC2.18 IC2.19 IC2.20 IC2.22 IC2.23 IC2.24 IC2.25 IC2.26 IC2.27 IC2.28 IC2.30 IC2.31 IC2.32 IC2.M1 J2.1 J2.3 J2.30 P3.4 SW1.1 SW1.3 SW2.2 SW2.4 SW3.1 SW3.4 SW4.1 SW4.4 SW5.1 SW5.3 U1.4 U2.7 U2.8 U3.3 U3.4 U3.5 U3.6 U3.11 U3.12 U3.13 U3.14

## Polygon pours and split planes (outlines as drawn)
no net on Top Layer "NONET_L01_P001" (solid, pour order 1): 73.279,51.816
GND on Int1 (GND) (split plane): 162.431,25.91 62.232,25.91 62.232,84.453 162.431,84.453
3V3_MCU on Int2 (PWR) (split plane): 162.431,25.91 62.232,25.91 62.232,84.453 162.431,84.453

## Other copper
Top Layer:
  rectangle net 5V: 62.738,38.862 67.437,41.846
  rectangle net GND: 64.262,42.164 67.056,44.958
  rectangle net 3V3_MCU: 69.469,35.687 73.787,41.91
  region net 3V3_DEBUG: 71.063,50.739 71.063,52.538 67.253,52.538 67.253,50.739
Bottom Layer:
  region net 5V: 74.422,48.006 74.422,49.403 76.708,49.403 76.708,49.276 76.708,49.022 76.708,48.006
  region: 74.422,48.006
  region net 5V: 65.532,70.231 66.929,70.231 66.929,68.167 64.008,64.516 64.008,50.165 65.458,48.715 66.167,48.006 76.708,48.006 76.708,46.736 63.754,46.736 63.754,38.862 62.738,38.862 62.738,71.501 66.421,71.501 66.929,71.501 66.929,70.231
  region: 82.55,48.768

## Silkscreen, mask and mechanical layers (free items; w line width, h text height)
Top Overlay:
  lines w0.254: 122.174,80.264 122.174,75.184 122.682,74.676 127,74.676 127.254,74.93 127.254,80.264
  text "SWD/JTAG" at 90.808,79.372 h1.2 r270
  text "FPGA_CONF" at 141.428,79.375 h1.2 r270.55
  text "A4" at 104.651,76.076 h1.2
  text "A0" at 114.811,76.076 h1.2
  text "GND" at 122.939,75.568 h1.2
  text "5V" at 129.029,75.187 h1.2 r90
  text "VIN" at 121.155,74.298 h1.2 r90
  text "3V3" at 131.442,74.044 h1.2 r90
  text "20" at 152.911,55.629 h1.2
  text "19" at 156.086,55.629 h1.2
  text "MCU IO" at 158.374,51.942 h1.2 r270.67
  text "0" at 102.492,32.515 h1.2
  text "7" at 120.653,32.515 h1.2
  text "8" at 124.209,32.515 h1.2
  text "13" at 136.655,32.515 h1.2
  text "GND" at 140.711,32.513 h1.2 r91.06
  text "2" at 153.419,27.689 h1.2
  text "1" at 156.467,27.689 h1.2
  text "XKBoard MCU 1.0" at 132.083,27.054 h1.2

## Text inside footprints (layer, text, board x,y; h text height)
IC1: Mechanical 7 "37" at 113.94,41.713 h0.94 r90; Mechanical 7 "36" at 112.69,43.963 h0.94 r180; Mechanical 7 "72" at 132.44,42.713 h0.94 r270; Mechanical 7 "73" at 134.44,43.963 h0.94 r180; Mechanical 7 "108" at 133.69,62.463 h0.94; Mechanical 7 "109" at 132.44,64.963 h0.94 r270; Mechanical 7 "144" at 113.94,63.713 h0.94 r90; Mechanical 7 "1" at 112.19,62.463 h0.94
P1: Top Overlay "2" at 96.277,82.44 h1.02 r270; Top Overlay "1" at 93.577,82.14 h1.02 r270; Top Overlay "9" at 93.577,68.12 h1.02 r270; Top Overlay "10" at 96.277,68.12 h1.02 r270
P2: Mechanical 13 "PCB EDGE" at 63.552,37.966 h0.31 r270
P3: Mechanical 13 "PCB EDGE" at 63.552,84.98 h0.31 r270
P4: Top Overlay "2" at 145.023,66.277 h1.02 r90; Top Overlay "1" at 147.723,66.577 h1.02 r90; Top Overlay "9" at 147.723,80.597 h1.02 r90; Top Overlay "10" at 145.023,80.597 h1.02 r90